# Altium PCB STM32CC02.PcbDoc
Units mil, origin at the board's own origin, x right, y up, seen from the top; angles counter-clockwise.
Board outline 1299.21 x 1968.5 mil, 2 copper layers (Top Layer, Bottom Layer); 44 components, 44 nets, 192 pads, 211 vias.
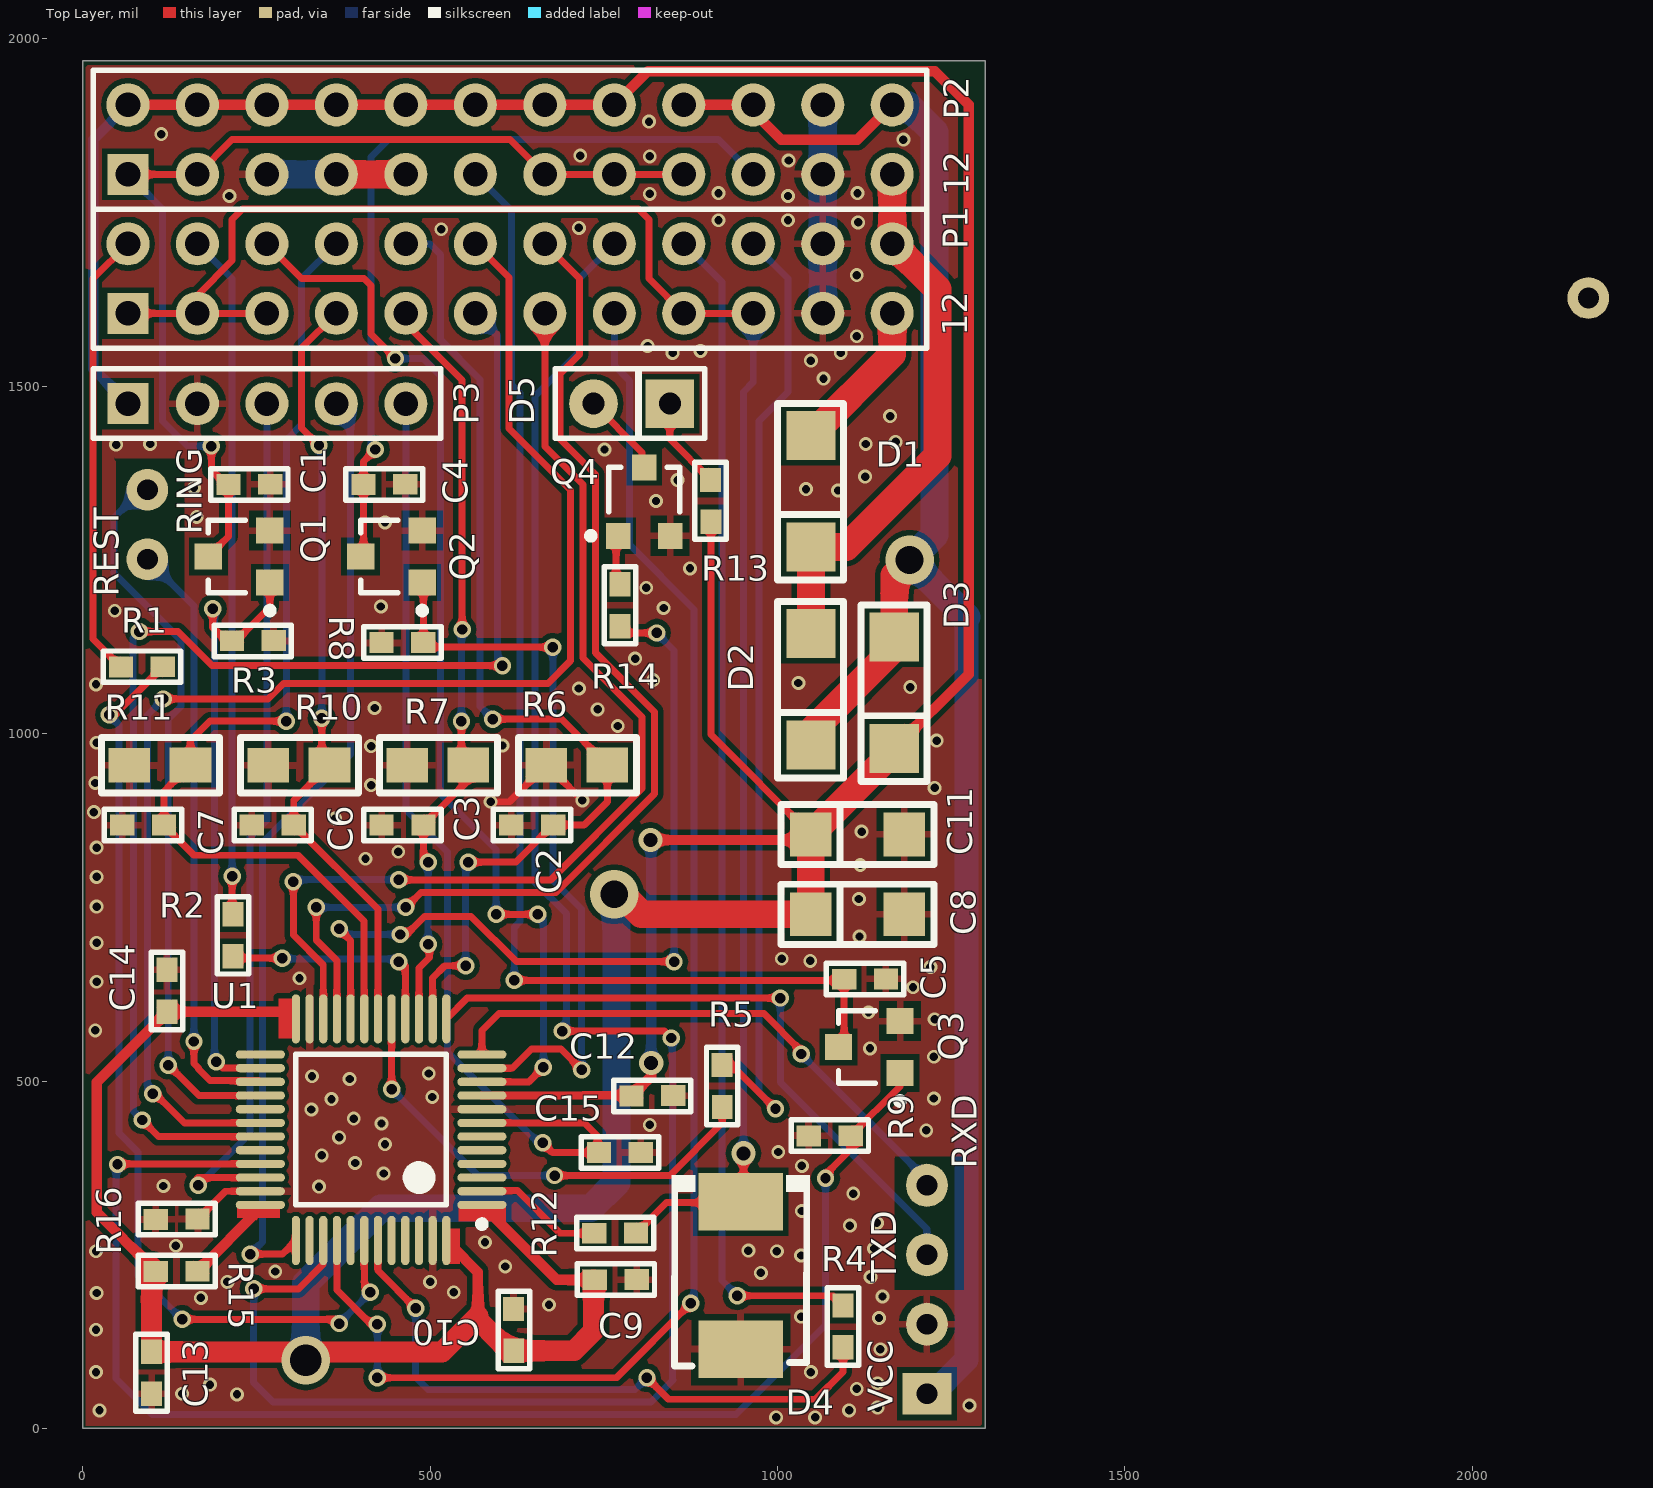
[diagram p0: Top Layer view]
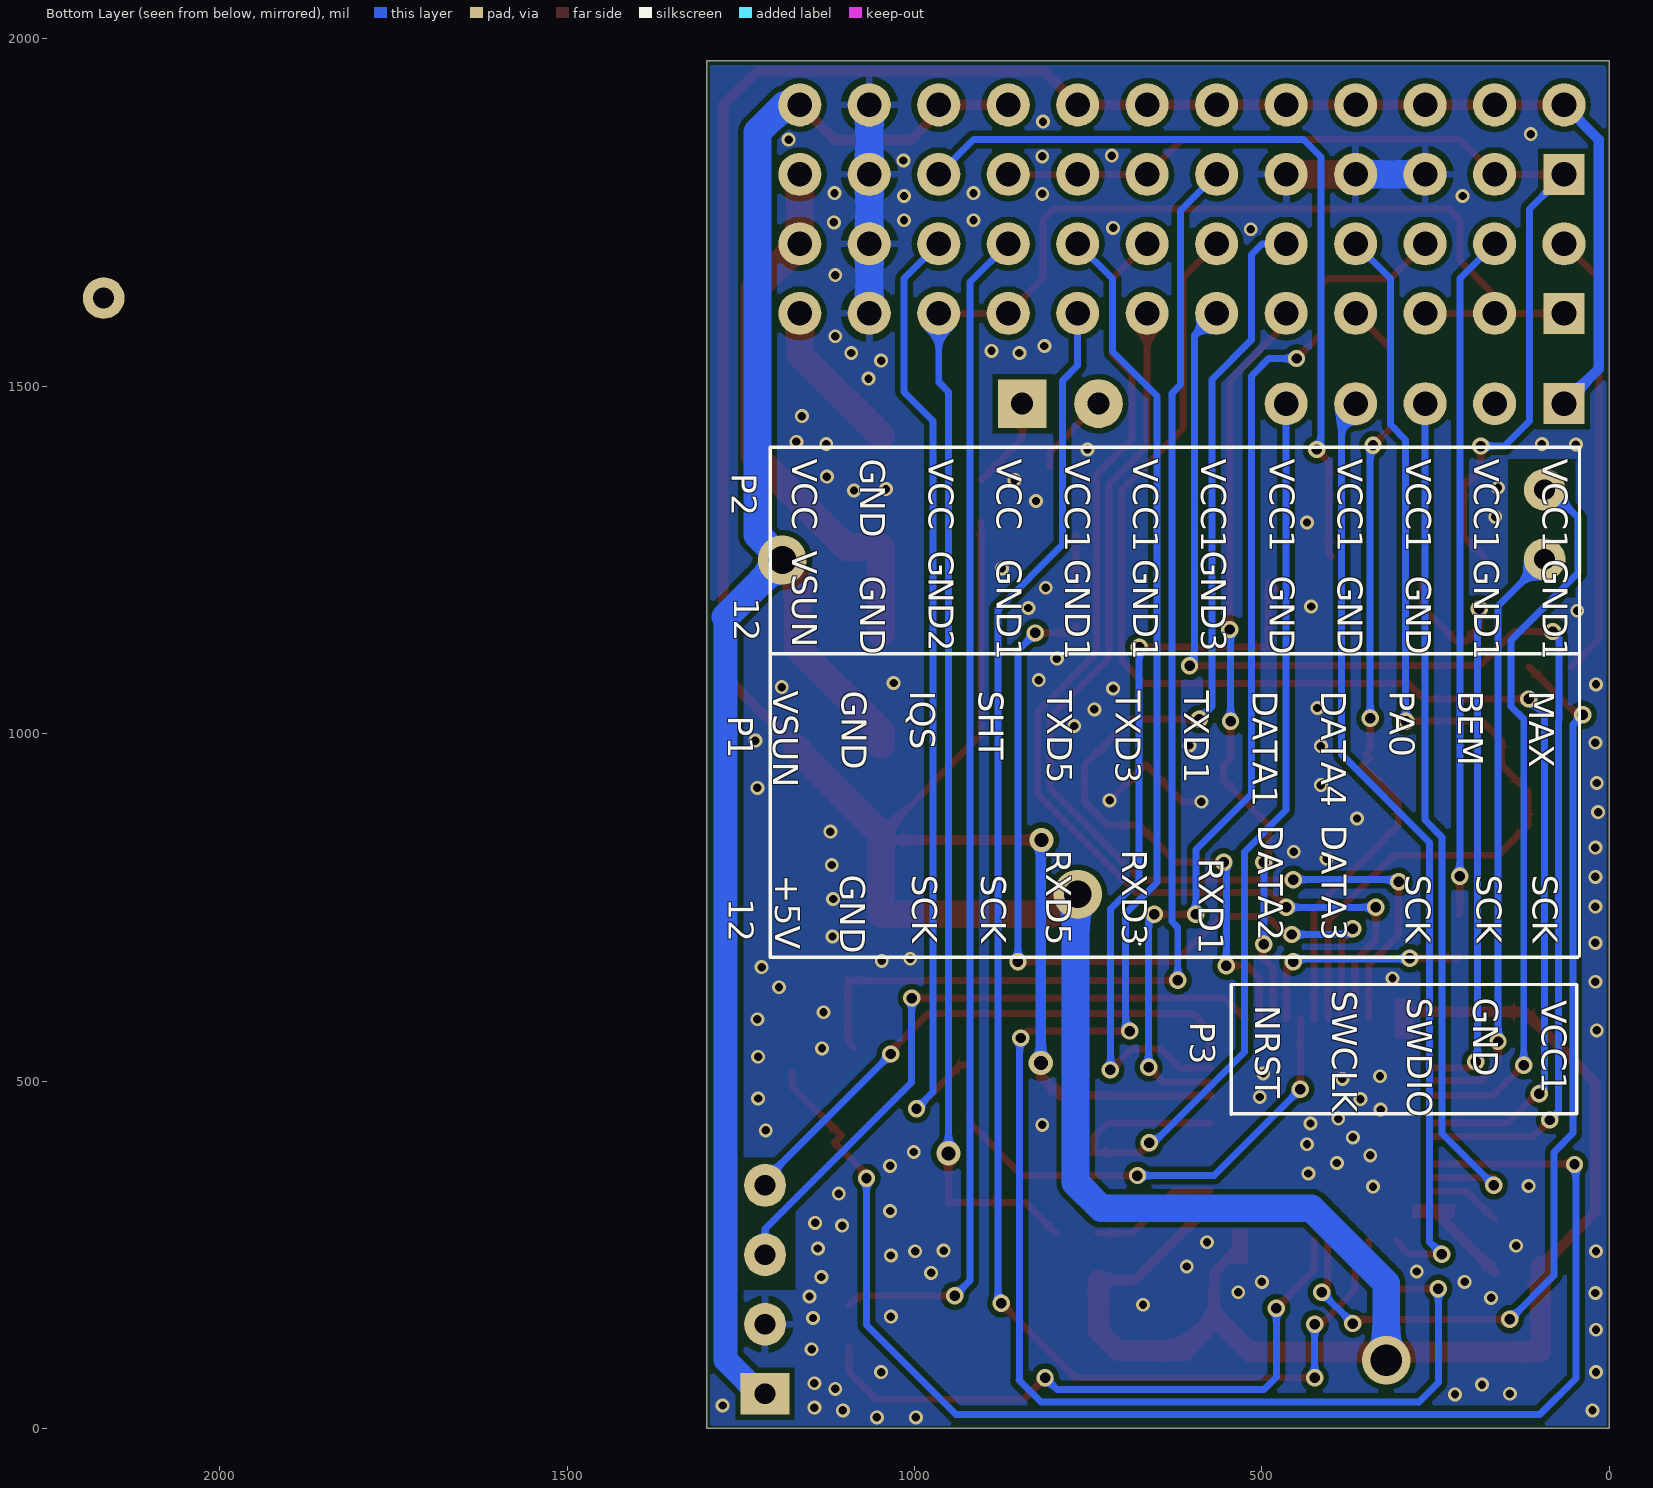
[diagram p1: Bottom Layer view, seen from below]

## Layer stack, top to bottom
Top Solder: solder mask 0.4, Solder Resist, Dk 3.5
Top Layer: signal copper 1.4
Dielectric 1: dielectric 12.6, FR-4, Dk 4.8
Bottom Layer: signal copper 1.4
Bottom Solder: solder mask 0.4, Solder Resist, Dk 3.5

## Board outline
0,0 0,1968.5 1299.21,1968.5 1299.21,0

## Design rules (kind name [scope] priority, off if disabled: settings)
Clearance Clearance_1 [InComponent('U1')] p1: gap=6
Clearance [All] p2: gap=8
PolygonConnect [All] p1: connectstyle=Relief reliefconductorwidth=10 reliefentries=4 polygonreliefangle="90 Angle" airgapwidth=10
RoutingVias [All] p1: holewidth=28 width=50 viastyle="Through Hole" minholewidth=12 minwidth=12 maxholewidth=100 maxwidth=100
SolderMaskExpansion [All] p1: expansion=4
Width [All] p1: maxlimit=100 minlimit=10 preferedwidth=10
30 further rules are at their usual default settings.

## Components (designator, comment, footprint, x,y, rotation, side; value= is the part's Value field where it differs from the comment)
C1 "Cap" 0603 230,1360 r0 top
C2 "C_0.1uF" 0603 636.96,869.72 r0 top
C3 "C_0.1uF" 0603 450.29,869.72 r0 top
C4 "Cap" 0603 424.29,1360 r0 top
C5 "Cap" 0603 1116,648 r0 top
C6 "C_0.1uF" 0603 263.63,869.72 r0 top
C7 "C_0.1uF" 0603 76.96,869.72 r0 top
C8 "4.7uF" 1206 1115,740 r0 top
C9 "100nF" 0603 777,213 r180 top
C10 "100nF" 0603 619,132 r90 top
C11 "1uF" 1206 1115,855 r0 top
C12 "10nF" 0603 810,480 r0 top
C13 "100nF" 0603 100,90 r270 top
C14 "100nF" 0603 120,620 r90 top
C15 "0.1uF" 0603 783,396 r180 top
D1 "Diode" 1N4007-M7 1050,1265 r90 top
D2 "Diode" 1N4007-M7 1050,980 r90 top
D3 "Diode" 1N4007-M7 1170,975 r90 top
D4 "SMBJ6.8CA" DO-214AB 947,220 r270 top
D5 "LED RED" LED-3mm 845,1475 r180 top
P1 "Header 12X2A" HDR2X12_CEN 65,1605 r0 top
P2 "Header 12X2A" HDR2X12_CEN 65,1805 r0 top
P3 "Header 5" HDR1X5 65,1475 r0 top
Q1 "SI2302" SOT23-3 225,1255 r90 top
Q2 "SI2302" SOT23-3 444.29,1255 r90 top
Q3 "SI2302" SOT23-3 1132,549 r90 top
Q4 "9013" SOT-23 808,1334 r0 top
R1 "1K" 0603 95,1095 r180 top
R2 "1K" 0603 215,700 r90 top
R3 "100K" 0603 235,1135 r0 top
R4 "1K" 0603 1093,137 r90 top
R5 "1K" 0603 919,483 r90 top
R6 "50R" 0805 666.96,954.72 r90 top
R7 "50R" 0805 466.96,954.72 r90 top
R8 "100K" 0603 470,1130 r180 top
R9 "100K" 0603 1085,420 r180 top
R10 "50R" 0805 266.96,954.72 r90 top
R11 "50R" 0805 66.96,954.72 r90 top
R12 "1K" 0603 776,280 r180 top
R13 "R_1K" 0603 905,1345 r270 top
R14 "R_2.2K" 0603 772,1175 r90 top
R15 "0" 0603 145,225 r180 top
R16 "0" 0603 145,300 r180 top
U1 "STM32" LQFP48_N 415,430 r180 top

## Footprints (in the part's own frame and the unit in brackets; to place one, negate y for a bottom-side part, rotate by r counter-clockwise, add the part's x,y. Pads: shape width x height; smd on the part's side, far side on the other; paste and mask are expansions set on the pad)
1N4007-M7 [mm]
  rect 1.8x1.8 smd: 1(4.166,0.05) 2(0.096,0.05)
  silkscreen extent -1.12,-1.14 5.33,1.27
0603 [mil] "0603"
  rect 35x30 smd: 1(40,-1) 2(-20.23,-1.34)
  silkscreen extent -46,-24 65,21
0805 [mil]
  rect 50x60 smd: 1(0,0) 2(0.28,-88.04)
  silkscreen extent -40,-130 40,40
1206 [mm]
  rect 1.52x1.6 smd: 1(-1.71,0) 2(1.71,0)
  silkscreen extent -2.79,-1.1 2.79,1.1
DO-214AB [mm]
  rect 2.1x3.1 smd: 1(2.7,0) 2(-2.7,0)
  silkscreen extent -3.68,-2.54 3.3,2.54
HDR1X5 [mil] "Connector; Header; 5 Position"
  rect 59.06x59.06 hole 35.43: 1(0,0)
  round 62 hole 35.43: 2(100,0) 3(200,0) 4(300,0) 5(400,0)
  silkscreen extent -50,-50 450,50
HDR2X12_CEN [mil] "Connector; Header; 12x2 Position"
  rect 59.06x59.06 hole 35.43: 1(0,0)
  round 62 hole 35.43: 2(100,0) 3(200,0) 4(300,0) 5(400,0) 6(500,0) 7(600,0) 8(700,0) 9(800,0) 10(900,0) 11(1000,0) 12(1100,0) 13(0,100) 14(100,100) 15(200,100) 16(300,100) 17(400,100) 18(500,100) 19(600,100) 20(700,100) 21(800,100) 22(900,100) 23(1000,100) 24(1100,100)
  silkscreen extent -50,-50 1150,150
LED-3mm [mil] "Connector; Header; 5 Position"
  rect 70x70 hole 31.5: 1(0,0)
  round 70 hole 31.5: 2(110,0)
  silkscreen extent -50,-50 165,50
LQFP48_N [mm] "Thin QFP, 48-Leads, Body 7x7mm, Pitch 0.5mm, IPC Medium Density"
  oval 1.8x0.3 smd: 1(-4.05,2.75) 2(-4.05,2.25) 3(-4.05,1.75) 4(-4.05,1.25) 5(-4.05,0.75) 6(-4.05,0.25) 7(-4.05,-0.25) 8(-4.05,-0.75) 9(-4.05,-1.25) 10(-4.05,-1.75) 11(-4.05,-2.25) 12(-4.05,-2.75) 25(4.05,-2.75) 26(4.05,-2.25) 27(4.05,-1.75) 28(4.05,-1.25) 29(4.05,-0.75) 30(4.05,-0.25) 31(4.05,0.25) 32(4.05,0.75) 33(4.05,1.25) 34(4.05,1.75) 35(4.05,2.25) 36(4.05,2.75)
  oval 0.3x1.8 smd: 13(-2.75,-4.05) 14(-2.25,-4.05) 15(-1.75,-4.05) 16(-1.25,-4.05) 17(-0.75,-4.05) 18(-0.25,-4.05) 19(0.25,-4.05) 20(0.75,-4.05) 21(1.25,-4.05) 22(1.75,-4.05) 23(2.25,-4.05) 24(2.75,-4.05) 37(2.75,4.05) 38(2.25,4.05) 39(1.75,4.05) 40(1.25,4.05) 41(0.75,4.05) 42(0.25,4.05) 43(-0.25,4.05) 44(-0.75,4.05) 45(-1.25,4.05) 46(-1.75,4.05) 47(-2.25,4.05) 48(-2.75,4.05)
  silkscreen extent -4.18,-2.75 2.75,3.57, body extent -3.5,-3.5 3.5,3.5, height 1.6
SOT23-3 [mm] "SOT-23; 3 Leads; Body 3.0 x 2.5 mm, inc. leads (LxW max)"
  rect 0.95x1 smd: 1(-0.95,-1.125) 2(0.95,-1.125) 3(0,1.125)
  silkscreen extent -2.1,-1.25 1.32,1.13
SOT-23 [mm] "SOT-23; 3 Leads; Body 3.0 x 2.6 mm, inc. leads (LxW max)"
  rect 0.9x0.95 smd: 1(-0.95,-1.25) 2(0.95,-1.25) 3(0,1.25)
  silkscreen extent -2.07,-1.37 1.3,1.25

## Part data
C1 C4 C5: "Capacitor"
C2 C3 C6 C7: library part Cap, "贴片电容 0603"
C8 C11: library part "Cap Pol1", "Polarized Capacitor (Radial)"
C9 C10 C12 C13 C14 C15: library part Cap, "Capacitor"
D1 D2 D3: "Default Diode"
D4: library part "D Zener", "Zener Diode"
D5: library part LED0, "插件 发光二极管 5mm 绿发绿光"
P1 P2: "Header, 12-Pin, Dual row"
P3: "Header, 5-Pin"
Q1 Q2 Q3: library part MOSFET-N, "N-Channel MOSFET"
Q4: library part NPN, "贴片三极管MMBT5551 SOT-23"
R1 R2 R3 R4 R5 R8 R9 R12 R15 R16: library part Res2, "Resistor"
R6 R7 R10 R11: library part Res2, "贴片电阻 0805 精度0.1%"
R13 R14: library part Resistor, "Resistor"

## Free pads (board coordinates)
  rect 70x60 hole 30: 2(1215,50)
  oval 60x62 hole 30: 3(1215,250) 4(1215,150) 5(1215,350)
  round 60 hole 30: 6(93,1351) 7(93,1251) 8(2167,1627)

## Via types
v1: diameter 20, hole 12, Top Layer to Bottom Layer, 143 vias
v2: diameter 25, hole 15, Top Layer to Bottom Layer, 62 vias
v3: diameter 35, hole 20, Top Layer to Bottom Layer, 3 vias
v4: diameter 70, hole 40, Top Layer to Bottom Layer, 2 vias
v5: diameter 70, hole 45, Top Layer to Bottom Layer, 1 vias

## Nets (pads, with @x,y where several pads share a name; then routed paths per layer and width w, separated by ;. In a path a pad name is that pad's centre, name@x,y a point inside that pad or via, vN(x,y) a via of type N, cw(c..) or ccw(c..) an arc to the next point about the centre after c; other vN are vias at no path point)
+5V: D1.1 P1.12 | length 224.4
  Top Layer w40: D1.1 1165,1546.01 P1.12
BEM280: P1.14 R2.1 | length 986.1
  Top Layer w10: v2(215,795) 215,741 R2.1
  Bottom Layer w10: P1.14 215,1655 v2(215,795)
DATA1: C2.1 P1.17 R6.2 U1.14 | length 1502.1
  Top Layer w10: U1.14 503.58,648.58 521,666 v2(551,666) ; v2(555,815) 623.24,815 C2.1 721.72,868.72 755,902 R6.2 689,1021 v2(590,1021)
  Bottom Layer w10: P1.17 500,1705 515,1690 515,1567 572,1510 572,1039 v2(590,1021) ; v2(551,666) 551,811 v2(555,815)
DATA2: C3.1 P1.5 R7.2 U1.15 | length 1086.4
  Top Layer w10: P1.5 465,1590 546,1509 v2(546,1150) ; U1.15 483.9,662.9 499,678 499,695 v2(497,697) ; v2(497,815) 490.29,821.71 C3.1 555,933.42 R7.2 545,965 v2(545,1018) ; v2@545,1021 v2@546.5,1019.5
  Bottom Layer w10: v2@497,700 v2(497,815) ; v2@545,1021 545,1149 v2(546,1150)
DATA3: C6.1 P1.4 R10.2 U1.18 | length 1129.3
  Top Layer w10: v2(340,1415) 315,1440 315,1555 P1.4 ; v2(344,1022) 344,978 351,971 345,965 R10.2 303.63,903.63 C6.1 424.84,747.5 U1.18
  Bottom Layer w10: v2(340,1415) 344,1411 v2(344,1022)
DATA4: C7.1 P1.16 R11.2 U1.19 | length 1489.6
  Top Layer w10: v2(293,1018) 183,1018 155,990 R11.2 116.96,916.96 C7.1 116.96,868.04 160,825 310,825 404.88,730.12 U1.19@404.88,589.73
  Bottom Layer w10: v2(293,1018) 293,1423 315,1445 315,1655 P1.16
GND: C1.1 C2.2 C3.2 C4.1 C5.1 C6.2 C7.2 C8.2 C9.2 C10.1 C11.2 C12.1 C13.1 C14.1 C15.2 D4.1 P1.11 P1.23 P2.3 P2.4 P2.5 P2.11 P2.23 P3.2 pad.4 Q1.2 Q2.2 Q3.2 Q4.2 R3.1 R6.1 R7.1 R8.1 R9.1 R10.1 R11.1 R16.1 R16.2 U1.8 U1.23 U1.35 U1.47 | length 781.8
  Top Layer w10: R16.2 205.31,341.42 U1.35 ; v1(587,902) 614.24,902 R6.1 668.28,954.72 v1(719,904)
  Top Layer w40: P2.4 P2.5
  Bottom Layer w40: P2.3 P2.4 ; P1.11 P1.23 P2.11 P2.23
  other v1: 998,16 1054,16 24,26 1103,26 1144,30 1276,33 222,49 143,50 1114,57 183,63 1144,65 19,81 1048,81 1148,114 19,142 1146,159 1034,161 671,178 170,188 1151,190 20,195 534,196 208,211 500,211 1134,218 976,224 277,226 608,233 1034,249 19,255 999,255 958,256 1139,259 134,263 579,268 1104,292 1143,296 1035,313 1109,338 340,348 116,349 433,367 1035,378 392,382 344,393 1001,398 435,409 369,419 1214,429 816,437 430,439 390,446 329,459 358,474 1225,475 503,477 384,503 330,507 498,511 1225,535 1133,547 18,573 1226,589 1131,599 1195,635 20,643 312,648 1220,664 1047,673 1006,676 20,699 1118,708 20,751 1117,762 20,794 1119,811 407,820 454,830 20,836 1121,859 363,878 16,887 1226,922 415,926 18,929 415,982 604,983 20,987 1229,990 770,1011 741,1035 420,1037 714,1065 1191,1067 19,1071 1030,1073 821,1077 795,1108 46,1177 836,1181 429,1183 811,1210 874,1238 435,1304 164,1312 825,1335 1087,1350 1041,1352 160,1354 856,1365 1126,1370 751,1409 48,1416 97,1417 1127,1417 1170,1420 1162,1457 1066,1511 1048,1537 849,1548 1091,1548 889,1551 813,1558 1114,1572 1114,1660 516,1726 714,1728 1116,1736 915,1739 1015,1739 211,1774 1015,1774 816,1777 915,1778 1115,1778 1016,1825 816,1831 716,1832 1181,1855 113,1863 815,1881
GND1: C1.2 P2.1 P2.2 P2.7 P2.8 P2.9 Q1.3 | length 1493.8
  Top Layer w10: P2.1 P2.2 215,1855 615,1855 P2.7 P2.8 P2.9 ; Q1.3 209.77,1284.06 C1.2 209.77,1365.23 204.54,1360 185,1379.54 v2(185,1414)
  Bottom Layer w10: P2.1 115,1755 115,1450 151,1414 v2(185,1414)
GND2: C4.2 P2.10 Q2.3 | length 1167.2
  Top Layer w10: Q2.3 404.06,1259.06 C4.2 404.06,1392.06 v2(421,1409)
  Bottom Layer w10: v2(421,1409) 415,1415 415,1830 440,1855 915,1855 P2.10
GND3: C5.2 P2.6 Q3.3 | length 1766.7
  Top Layer w10: v2(621,645) 1094.11,645 C5.2 1095.77,557.06 Q3.3
  Bottom Layer w10: P2.6 617,1753 617,1502.5 629.5,1490 629.5,729.44 621,720.94 v2(621,645)
IQS127D: P1.22 R5.1 | length 1396.1
  Top Layer w10: R5.1 934,523 v2(997,460)
  Bottom Layer w10: P1.22 1015,1655 1015,1492 973,1450 973,484 v2(997,460)
MAX44009: P1.13 R1.1 | length 646.3
  Top Layer w10: R1.1 15,1136 15,1655 P1.13
NetD5_1: D5.1 R13.2 | length 134.1
  Top Layer w10: D5.1 845,1423.89 R13.2
NetD5_2: D5.2 Q4.3 | length 119.8
  Top Layer w10: D5.2 805,1405 Q4.3@805,1384.21
NetP1_21: P1.21 R4.1 | length 1703.7
  Top Layer w10: v2(942,191) 1080,191 R4.1
  Bottom Layer w10: P1.21 920,1650 920,213 v2(942,191)
NetQ4_1: Q4.1 R14.1 | length 71.4
  Top Layer w10: R14.1@766,1215 767.6,1216.6 Q4.1@767.6,1285.79
NetR15_2: R15.2 U1.36 | length 127.7
  Top Layer w15: R15.2 U1.36@255.55,316.66
NRST: C15.1 P3.5 U1.7 | length 1434.3
  Top Layer w10: U1.7 722.16,439.84 741,421 C15.1@741,397 ; v2(662,411) 676,397 C15.1@741,397 ; C15.1 C15.1@741,397
  Bottom Layer w10: P3.5 465,890 525,830 525,542 656,411 v2(662,411)
PA0: P1.15 U1.10 | length 1558.4
  Top Layer w10: P1.15 315,1655 405,1655 415,1645 415,1575 v2(450,1540) ; U1.10 641.9,498.9 v2(663,520) ; v2(595,740) v2(655,740)
  Bottom Layer w10: v2(450,1540) 490,1540 515,1515 515,913 595,833 v2(595,740) ; v2(655,740) 663,732 v2(663,520)
PA1: Q2.1 R8.2 U1.11 | length 1086.6
  Top Layer w10: Q2.1@479.52,1208.54 Q2.1 490.23,1215.95 R8.2 490.23,1124.5 v2(676.5,1124.5) v2@677,1124 ; U1.11 618.58,518.58 646,546 688,546 v2(718,516)
  Bottom Layer w10: v2(676.5,1124.5) 676.5,788.5 717.5,747.5 717.5,516.5 v2(718,516)
PA2: pad.5 U1.12 | length 802.1
  Top Layer w10: U1.12 574.45,573 598.95,597.5 700.56,597.5 700.79,597.27 980.27,597.27 1034,543.54 v2(1034,539)
  Bottom Layer w10: v2@1040.77,539 v2(1034,539) 1215,358 pad.5
PA3: pad.3 U1.13 | length 950.1
  Top Layer w10: U1.13 553.32,619.5 v2(1004,619.5)
  Bottom Layer w10: v2(1004,619.5) 1004,498 1215,287 pad.3
PA6: R2.2 U1.16 | length 331.7
  Top Layer w10: R2.2 221.11,675 223.11,677 v2(287,677) ; v2@454,676 464.21,665.79 U1.16
  Bottom Layer w10: v2(287,677) 288,676 v2@454,676
  other v2: 455,672
PA7: R5.2 U1.17 | length 683.7
  Top Layer w10: U1.17 v2(444.53,488.47) v2@445,488 ; v2(679,364) 845,364 920.34,439.34 R5.2
  Bottom Layer w10: v2(444.53,488.47) 569,364 v2(679,364)
PA9: P1.18 U1.30 | length 2015.2
  Top Layer w10: v2@104,482 146.16,439.84 U1.30 ; v2(116,1050) 266.5,1050 289,1072.5 669.5,1072.5 702,1105 702,1351 613.5,1439.5 613.5,1656.5 P1.18
  Bottom Layer w10: v2(100.5,482) 93,489.5 93,1027 v2(116,1050)
PA10: P1.6 U1.31 | length 1965.1
  Top Layer w10: v2(81,1147) 137,1147 186,1098 v2(604,1098) ; v2(85.31,444) 109.16,420.16 U1.31
  Bottom Layer w10: v2(81,1147) 72,1138 72,1018.94 73,1017.94 73,456.32 v2(85.31,444) v2@85.31,437.68 ; P1.6 597,1573 597,1105 v2(604,1098)
PA12: Q3.1 R9.2 U1.33 | length 2027.5
  Top Layer w10: v2(50,380) 50.79,380.79 U1.33 ; v2(1069,360) 1069,365.57 1115,411.57 R9.2 1176.29,492.4 Q3.1
  Bottom Layer w10: v2@54,380 48,374 48,72 100,20 940,20 1069,149 v2(1069,360)
PA13: P3.3 U1.34 | length 1263.4
  Top Layer w10: v2@160.5,355.5 166.1,361.1 U1.34
  Bottom Layer w10: v2(166,350) 240.5,424.5 240.5,850.96 265,875.46 P3.3
PA14: P3.4 U1.37 | length 1365.8
  Top Layer w10: v2(241,251) 287.18,251 U1.37
  Bottom Layer w10: v2(241,251) 258.5,268.5 258.5,793.61 258.5,843.5 385,970 385,1455 P3.4
PB2: R14.2 U1.20 | length 1206.4
  Top Layer w10: v2(369,719) 385.47,702.53 U1.20 ; v2(457,711) 466,711 492,737 559,737 624,672 v2(851,672) ; R14.2@766.34,1154.77 776.11,1145 v2(826,1145)
  Bottom Layer w10: v2(369,719) 377,711 v2(457,711) ; v2(826,1145) 851,1120 v2(851,672)
PB3: P1.20 U1.39 | length 2767.9
  Top Layer w10: v2(246,201) 310.3,201 346.1,236.8 U1.39 ; v2(690,572) 837,572 v2(847,562)
  Bottom Layer w10: v2(246,201) 246,66 274,38 818,38 849.5,69.5 848.5,70.5 848.5,560.5 v2(847,562) ; v2(690,572) 696,578 696,741 651,786 651,1486 715,1550 715,1655 P1.20
PB4: P1.8 U1.40 | length 2197
  Top Layer w10: U1.40 365.79,199.21 415,150 v2(424,150) ; v2(424,73) 768,73 v2(875,180)
  Bottom Layer w10: v2(424,73) v2(424,150) ; P1.8 765,1530 787,1508 787,1272 880,1179 880,185 v2(875,180)
PB6: R1.2 U1.42 | length 1389.8
  Top Layer w10: v2(38,1027) 45.89,1027 R1.2 ; v2(143,157) 363,157 v2(369,151) ; U1.42 405.16,204.84 v2(414,196)
  Bottom Layer w10: v2(38,1027) 52,1013 52,425.06 79.5,397.56 79.5,220.5 v2(143,157) ; v2(369,151) v2(414,196)
PB7: R4.2 U1.43 | length 913.4
  Top Layer w10: U1.43 424.84,227.16 v2(479,173) ; v2(812,73) 843,42 1055,42 1094.34,81.34 R4.2
  Bottom Layer w10: v2(479,173) 479,74 497,56 795,56 v2(812,73)
PB10: P1.19 U1.21 | length 1607.7
  Top Layer w10: v2(336,750) 336,703 365.79,673.21 U1.21 ; v2(465,750) 486.5,771.5 680.96,771.5 823,913.54 823,1031.46 738,1116.46 738,1373 687,1424 687,1518 715,1546 715,1655 P1.19
  Bottom Layer w10: v2(336,750) v2(465,750)
PB11: P1.7 U1.22 | length 1515.3
  Top Layer w10: v2(303,787) 303,710 346.1,666.9 U1.22 ; v2(455,790) 455.5,789.5 673.5,789.5 805,921 805,1024 720,1109 720,1358.46 665,1413.46 P1.7
  Bottom Layer w10: v2(303,787) 306,790 v2(455,790)
PB13: Q1.1 R3.2 U1.26 | length 894.3
  Top Layer w10: v2(187,1180) 187,1153 206.34,1133.66 R3.2 220.66,1133.66 269.29,1182.29 Q1.1 ; v2(192,528) 201.42,518.58 U1.26
  Bottom Layer w10: v2(187,1180) 189.5,1177.5 189.5,530.5 v2(192,528)
PB14: pad.7 U1.27 | length 860.7
  Top Layer w10: v2(160,557) 160,525.06 166.5,518.56 166.5,517.44 183.35,500.58 253.87,500.58 U1.27
  Bottom Layer w10: pad.7 160,1184 v2(160,557)
PB15: pad.6 U1.28 | length 1050.9
  Top Layer w10: v2(123,523) 123.21,523 167,479.21 U1.28
  Bottom Layer w10: pad.6 85,1351 45,1311 45,1231 141.5,1134.5 141.5,1039.44 123,1020.94 v2(123,523)
PC13: R12.1 U1.2 | length 186.9
  Top Layer w10: U1.2@574.45,342.23 625.77,342.23 687,281 R12.1
SCK: D4.2 P1.1 P1.2 P1.3 P1.9 P1.10 R12.2 | length 2686.2
  Top Layer w10: P1.1 P1.2 ; P1.3 P1.2 ; R12.2 839.89,325 948.38,325 951,322.38 v3(951,396) ; P1.10 P1.9 815,1655 815,1740 800,1755 230,1755 215,1740 215,1681 165,1631 P1.2
  Bottom Layer w10: v3(951,396) 951,1492 965,1506 P1.10
VCC: D2.2 D3.1 P2.21 P2.22 P2.24 pad.2 | length 2644.5
  Top Layer w15: P2.21 P2.22 965,1895 1005,1855 1115,1855 P2.24
  Top Layer w40: D2.2 1048.02,1003.02 1168.02,1123.02 D3.1 1168.02,1228.02 v4(1190,1250)
  Bottom Layer w35: pad.2@1216,43 1272,99 1272,1168
  Bottom Layer w40: P2.24 1187,1905 1226,1866 1226,1286 v4(1190,1250) 1272,1168
VCC1: C8.1 C9.1 C10.2 C11.1 C12.2 C13.2 C14.2 D3.2 P2.13 P2.14 P2.15 P2.16 P2.17 P2.18 P2.19 P2.20 P3.1 R13.1 R15.1 U1.1 U1.9 U1.24 U1.48 | length 7535.8
  Top Layer w10: R13.1 904,998.68 C11.1
  Top Layer w12: U1.9 789.22,479.21 C12.2 ; 720.55,479.66 C12.2@789.77,479.66
  Top Layer w15: P2.13 P2.14 P2.15 P2.16 P2.17 P2.18 P2.19 P2.20 813.5,1953.5 1226.5,1953.5 1275,1905 1275,1085.77 D3.2 ; R15.1 98.66,232.34 20,311 20,498.43 C14.2 296.41,599.77 ; 530.91,262.91 568.66,225.16 568.66,161.89 ; 581.59,314.59 682.18,214 735,214 C9.1 ; C12.2@789.77,479.66 818,506.89 v3(818,526) ; v3@809,847 1039.68,847 C11.1
  Top Layer w30: R15.1@98.66,232.34 C13.2 517,110.23 568.66,161.89 ; 568.66,156.45 613.34,111.77 706.77,111.77 735,140 C9.1@735,214
  Top Layer w40: v4@765,779 804,740 C8.1 C11.1 1168.02,975.34 D3.2
  Bottom Layer w15: P3.1 15,1525 15,1855 P2.13 ; v3@809,847 818,838 v3(818,526)
  Bottom Layer w40: v5(321,98) 321,209 429,317 731,317 768,354 v4@768,749
  other v3: 817,847
  other v4: 765,769
VSUN: D1.2 D2.1 P1.24 P2.12 | length 793
  Top Layer w40: D2.1 D1.2 1098.79,1268.79 1230,1400 1230,1640 P1.24 P2.12
pads on no net: U1.3 U1.4 U1.5 U1.6 U1.25 U1.29 U1.32 U1.38 U1.41 U1.44 U1.45 U1.46

## Polygon pours and split planes (outlines as drawn)
GND on Top Layer "GND_L01_P000" (solid, pour order 0): 7,1963 8,1962 1294,1962 1294,6 1292,4 4,4 4,1959 7,1962
GND on Bottom Layer "GND_L02_P002" (solid, pour order 2): 7,1963 8,1962 1294,1962 1294,6 1292,4 4,4 4,1959 7,1962

## Other copper
Top Layer:
  rectangle net VCC1: 282,561 309,619
  rectangle net VCC1: 520,237 543,288
  rectangle net VCC1: 541,298 609,322
  rectangle net NetR15_2: 222,303 284,323
  pour cut-out: 1170,390 1169,389 1169,200 1268,200 1268,391 1171,391 1170,392
  pour cut-out: 46,1394 48,1392 48,1196 147,1196 146,1197 146,1396 46,1396 45,1397
Bottom Layer:
  pour cut-out: 1172,389 1171,388 1171,199 1270,199 1270,390 1173,390 1172,391
  pour cut-out: 46,1394 48,1392 48,1196 147,1196 146,1197 146,1396 46,1396 45,1397

## Silkscreen, mask and mechanical layers (free items; w line width, h text height)
Top Overlay:
  text "RING" at 171,1286 h36 r90
  text "REST" at 52,1197 h36 r90
  text "RXD" at 1287,374 h36 r90
  text "TXD" at 1171,211 h36 r90
  text "VCC" at 1166,24 h36 r90
Bottom Overlay:
  lines w5: 44,1115 1207.75,1115 1207.75,1412 42.75,1412 42.75,1116.25 42.75,680.25 45,678 1207.5,678 1207.75,678.25 1207.75,1120 ; 46.75,453 46.75,639 527.75,639 ; 49.75,453 543,453 543.75,452.25 543.75,639 ; 518.75,639 543.75,639 ; 543.75,623 543.75,639 ; 675.67,697.55 675.67,703.55
  text "VCC1" at 96,1396 h36 r90
  text "VCC1" at 194.18,1396 h36 r90
  text "VCC1" at 292.36,1396 h36 r90
  text "VCC1" at 390.55,1396 h36 r90
  text "VCC1" at 488.73,1396 h36 r90
  text "VCC1" at 586.91,1396 h36 r90
  text "VCC1" at 685.09,1396 h36 r90
  text "VCC1" at 783.27,1396 h36 r90
  text "VCC" at 881.45,1396 h36 r90
  text "VCC" at 979.64,1396 h36 r90
  text "GND" at 1077.82,1396 h36 r90
  text "VCC" at 1176,1396 h36 r90
  text "P2" at 1263,1375 h36 r90
  text "GND3" at 586.91,1263.01 h36 r90
  text "GND2" at 979.64,1263.01 h36 r90
  text "VSUN" at 1176,1263.01 h36 r90
  text "GND1" at 96,1251.01 h36 r90
  text "GND1" at 194.18,1251.01 h36 r90
  text "GND1" at 685.09,1251.01 h36 r90
  text "GND1" at 783.27,1251.01 h36 r90
  text "GND1" at 881.45,1251.01 h36 r90
  text "GND" at 292.36,1227.02 h36 r90
  text "GND" at 390.55,1227.02 h36 r90
  text "GND" at 488.73,1227.02 h36 r90
  text "GND" at 1077.82,1227.02 h36 r90
  text "12" at 1259,1196 h36 r90
  text "MAX" at 115,1062 h36 r90
  text "BEM" at 217.55,1062 h36 r90
  text "PA0" at 316.09,1062 h36 r90
  text "DATA4" at 414.64,1062 h36 r90
  text "DATA1" at 513.18,1062 h36 r90
  text "TXD1" at 611.73,1062 h36 r90
  text "TXD3" at 710.27,1062 h36 r90
  text "TXD5" at 808.82,1062 h36 r90
  text "SHT" at 907.36,1062 h36 r90
  text "IQS" at 1005.91,1062 h36 r90
  text "GND" at 1104.45,1062 h36 r90
  text "VSUN" at 1203,1062 h36 r90
  text "P1" at 1268,1026 h36 r90
  text "DATA3" at 414,869 h36 r90
  text "DATA2" at 505,869 h36 r90
  text "RXD3" at 701,833.01 h36 r90
  text "RXD5" at 810,833.01 h36 r90
  text "RXD1" at 591,821.02 h36 r90
  text "SCK" at 110,797.02 h36 r90
  text "SCK" at 191,797.02 h36 r90
  text "SCK" at 293,797.02 h36 r90
  text "SCK" at 904,797.02 h36 r90
  text "SCK" at 1003,797.02 h36 r90
  text "GND" at 1107,797.02 h36 r90
  text "+5V" at 1200,797.02 h36 r90
  text "12" at 1267,763 h36 r90
  text "SWCLK" at 398.75,630.04 h36 r90
  text "GND" at 195.75,620.04 h36 r90
  text "SWDIO" at 290.75,620.04 h36 r90
  text "VCC1" at 96.75,616.04 h36 r90
  text "NRST" at 509.75,609.04 h36 r90
  text "P3" at 602.75,585.04 h36 r90
Mechanical 1:
  the board outline again, w5

## Text inside footprints (layer, text, board x,y; h text height)
P1: Top Overlay "12" at 1273,1573 h36 r90
P2: Top Overlay "12" at 1275,1775 h36 r90